# Altium PCB L1-3.PcbDoc
Units mm, origin at the board's own origin, x right, y up, seen from the top; angles counter-clockwise.
Board outline 51.1 x 45.6 mm, 2 copper layers (Top Layer, Bottom Layer), stack 0.325 mm thick; 102 components, 104 nets, 339 pads, 197 vias.
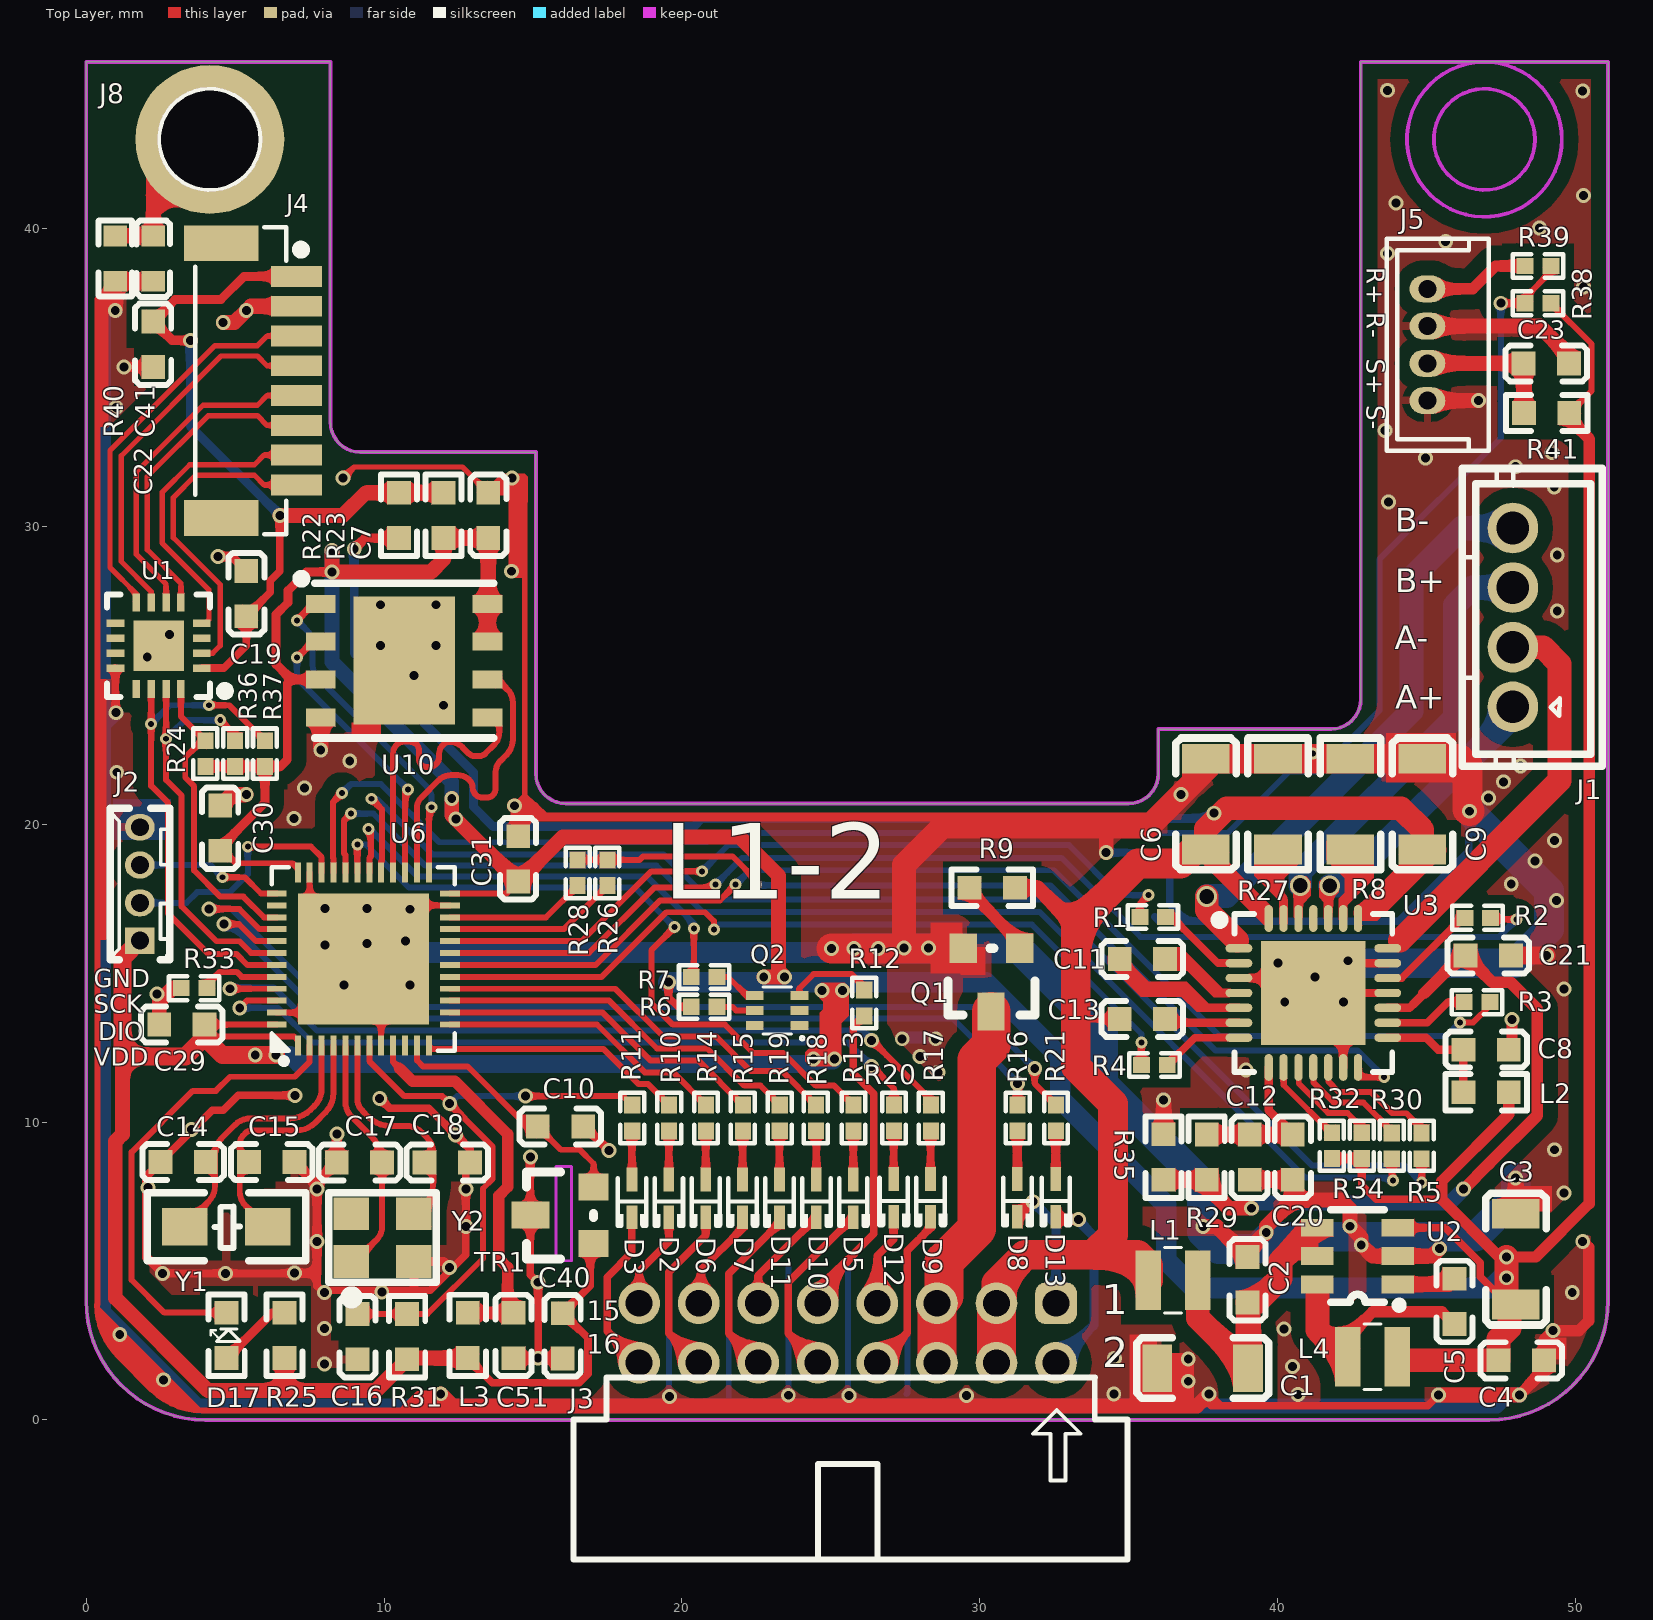
[diagram p0: Top Layer view]
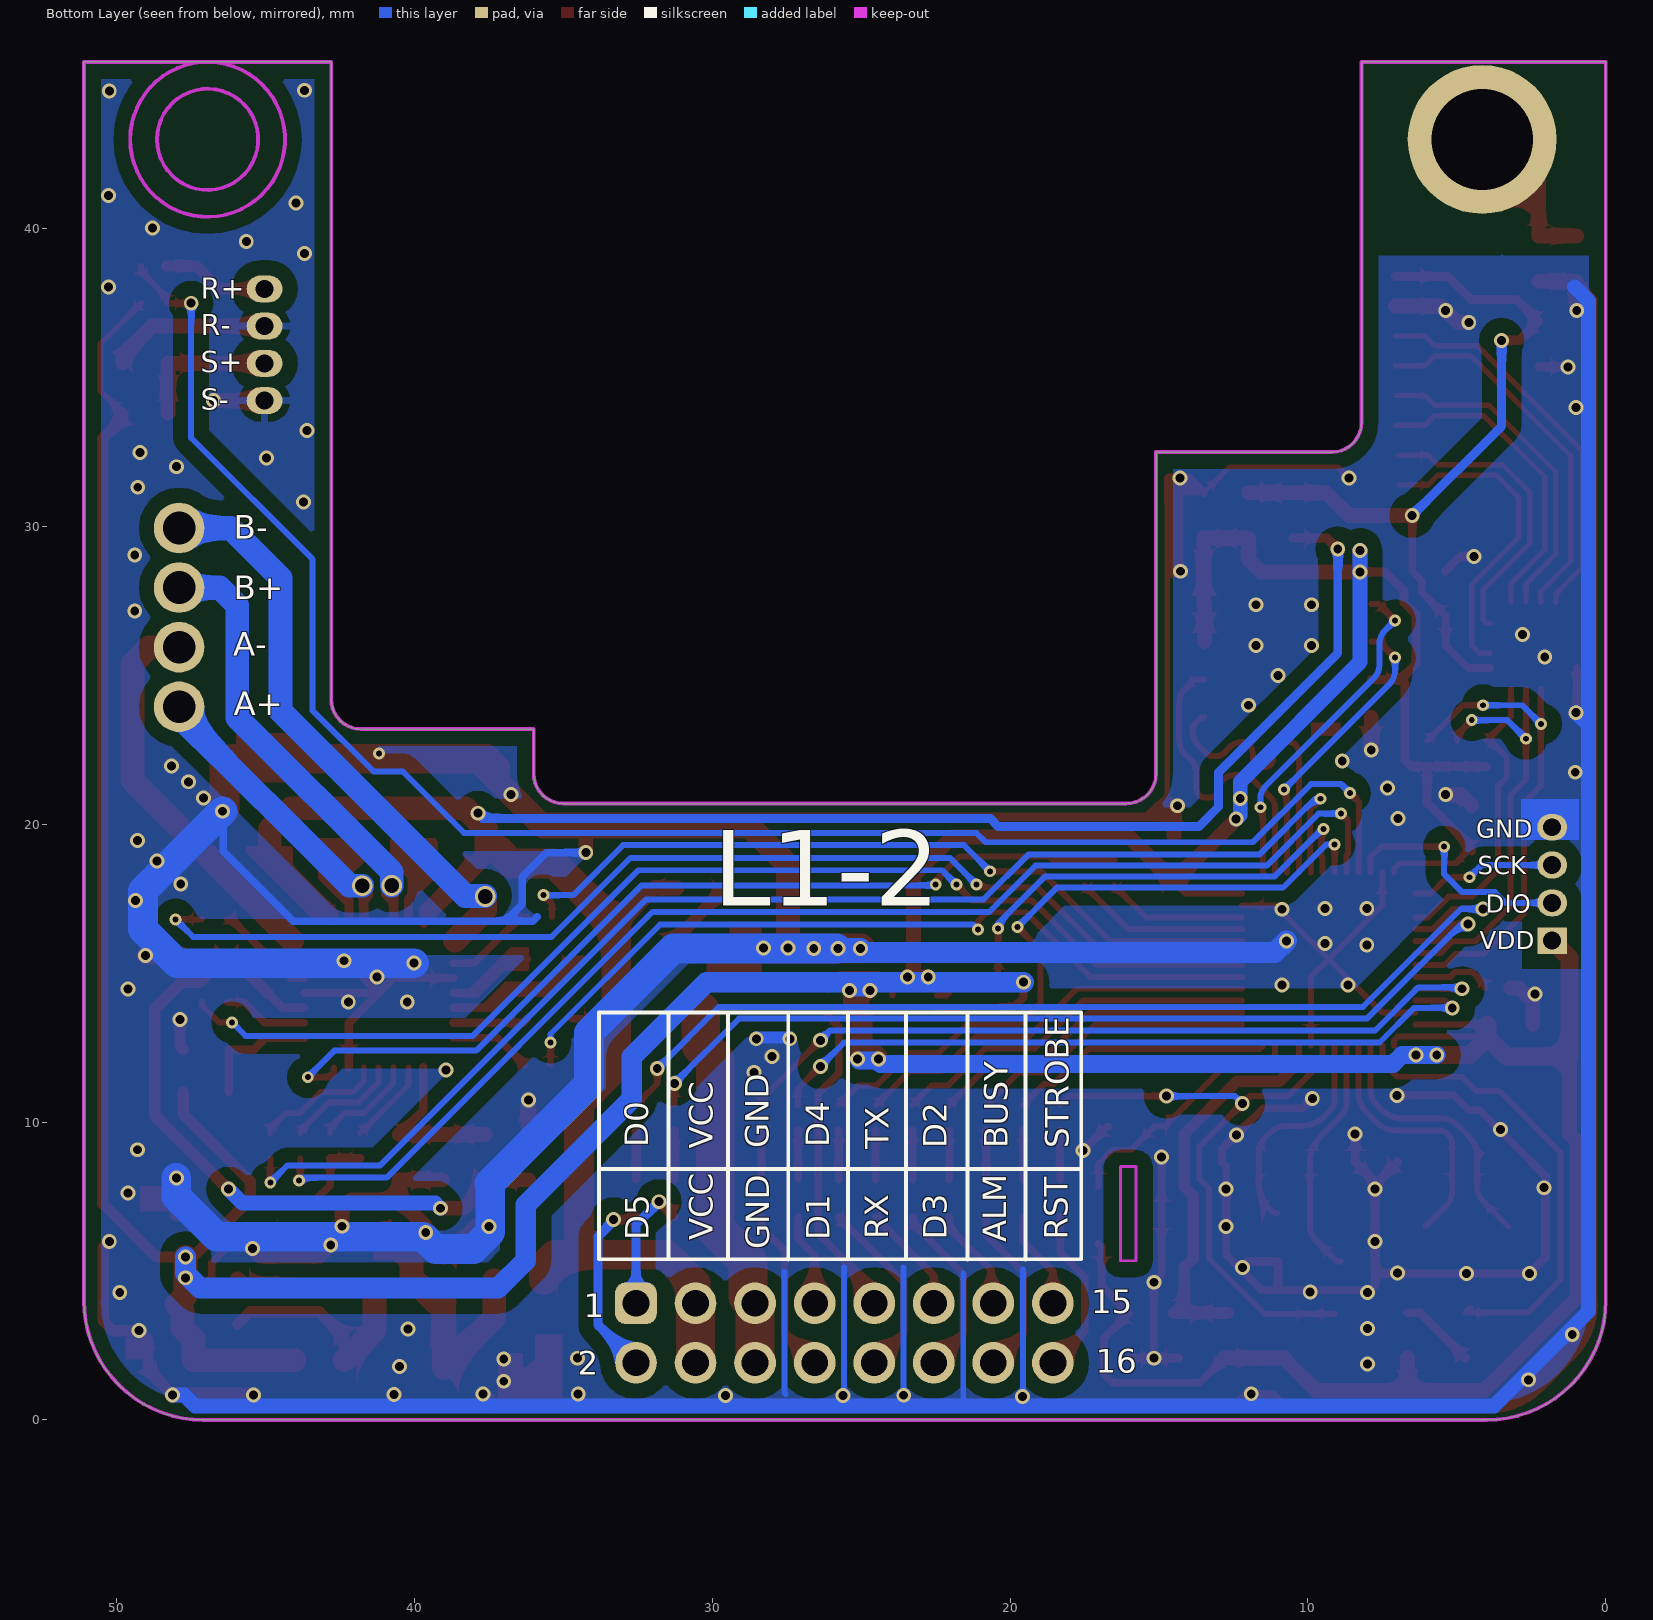
[diagram p1: Bottom Layer view, seen from below]

## Layer stack, top to bottom
Top Solder: solder mask 0.0102, Solder Resist, Dk 3.5
Top Layer: signal copper 0.0356
Dielectric 1: core 0.254, FR-4, Dk 4.2
Bottom Layer: signal copper 0.0356
Bottom Solder: solder mask 0.0102, Solder Resist, Dk 3.5

## Board outline
0,4 ccw(c4,4) 4,0 47.1,0 ccw(c47.1,4) 51.1,4 51.1,45.6 42.8,45.6 42.8,24.2 cw(c41.8,24.2) 41.8,23.2 36,23.2 36,21.7 cw(c35,21.7) 35,20.7 16.1,20.7 cw(c16.1,21.7) 15.1,21.7 15.1,32.5 9.2,32.5 cw(c9.2,33.5) 8.2,33.5 8.2,45.6 0,45.6

## Design rules (kind name [scope] priority, off if disabled: settings)
Clearance Clearance_1 [InPolygon] p1: gap=0.5
Clearance [All] p2: gap=0.145
PolygonConnect PolygonConnect_1 [IsVia] p1: connectstyle=Direct reliefconductorwidth=0.254 reliefentries=4 polygonreliefangle="90 Angle" airgapwidth=0.254
PolygonConnect [All] p2: connectstyle=Relief reliefconductorwidth=0.254 reliefentries=4 polygonreliefangle="90 Angle" airgapwidth=0.254
RoutingVias [All] p1: holewidth=0.3 width=0.5 viastyle="Through Hole" minholewidth=0.15 minwidth=0.3 maxholewidth=0.711 maxwidth=1.27
SolderMaskExpansion [All] p1: expansion=0.102
Width [All] p1: maxlimit=2.54 minlimit=0.1 preferedwidth=0.254
30 further rules are at their usual default settings.

## Classes and differential pairs
component class POWER_PART: C1 C2 C3 C4 C5 C41 D2 D3 D5 D6 D7 D8 D9 D10 D11 D12 D13 D17 J3 J8 L1 L4 Q1 Q2 R6 R7 R9 R10 R11 R12 R13 R14 R15 R16 R17 R18 R19 R20 R21 R25 R40 U2
component class Motor: C6 C8 C9 C11 C12 C13 C19 C20 C21 C22 C23 J1 J4 J5 L2 R1 R2 R3 R4 R5 R8 R22 R23 R24 R26 R27 R28 R29 R30 R32 R34 R35 R36 R37 R38 R39 R41 U1 U3
component class MCU_PART: C10 C14 C15 C16 C17 C18 C29 C30 C31 C40 C51 J2 L3 R31 R33 TR1 U6 Y1 Y2
component class SPI_FLASH: C7 U10

## Components (designator, comment, footprint, x,y, rotation, side; value= is the part's Value field where it differs from the comment)
C1 "47UF/25V" 1206c 37.491,1.74 r180 top locked
C2 "106/25V" 0603C/1#1 38.995,4.71 r90 top locked
C3 "47UF/25V" 1206c 48,5.399 r90 top locked
C4 "106/25V" 0603C/1#1 48.19,2.005 r0 top locked
C5 "104" 0603C/1#1 45.94,3.98 r270 top locked
C6 "47UF/25V" 1206c 37.595,20.68 r90 top locked
C7 "104" 0603C/1#1 13.5,30.375 r90 top locked
C8 "104" 0603c/1 47.005,12.435 r0 top locked
C9 "47UF/25V" 1206c 44.865,20.68 r90 top locked
C10 "104" 0603C/1#1 15.925,9.85 r180 top locked
C11 "223" 0603C/1#1 35.465,15.48 r180 top locked
C12 "106/25V" 0603C/1#1 39.068,8.828 r90 top locked
C13 "104" 0603C/1#1 35.465,13.47 r180 top locked
C14 "12PF" 0603C/1#1 3.253,8.659 r180 top locked
C15 "12PF" 0603C/1#1 6.227,8.66 r0 top locked
C16 "105" 0603C/1#1 9.114,2.8 r90 top locked
C17 "12PF" 0603C/1#1 9.175,8.65 r0 top locked
C18 "12PF" 0603C/1#1 12.125,8.65 r180 top locked
C19 "104" 0603C/1#1 5.375,27.75 r90 top locked
C20 "106/25V" 0603C/1#1 40.515,8.828 r90 top locked
C21 "106/25V" 0603C/1#1 47.075,15.6 r0 top locked
C22 "104" 0603C/1#1 2.25,36.125 r270 top locked
C23 "104" 0603C/1#1 49.027,35.48 r0 top locked
C29 "104" 0603C/1#1 3.213,13.28 r0 top locked
C30 "104" 0603C/1#1 4.5,19.875 r270 top locked
C31 "104" 0603C/1#1 14.505,18.842 r270 top locked
C40 "104" 0603C/1#1 16,2.825 r90 top locked
C41 "102/630V" 0603C/1#2 2.25,39 r90 top locked
C51 "106/25V" 0603C/1#1 14.345,2.837 r90 top locked
D2 "1N4148WT" SOD-523_L1.2-W0.8 19.563,7.44 r90 top locked
D3 "1N4148WT" SOD-523_L1.2-W0.8 18.325,7.44 r90 top locked
D5 "1N4148WT" SOD-523_L1.2-W0.8 25.755,7.44 r90 top locked
D6 "1N4148WT" SOD-523_L1.2-W0.8 20.802,7.44 r90 top locked
D7 "1N4148WT" SOD-523_L1.2-W0.8 22.04,7.44 r90 top locked
D8 "1N4148WT" SOD-523_L1.2-W0.8 31.267,7.46 r90 top locked
D9 "1N4148WT" SOD-523_L1.2-W0.8 28.352,7.46 r90 top locked
D10 "1N4148WT" SOD-523_L1.2-W0.8 24.517,7.44 r90 top locked
D11 "1N4148WT" SOD-523_L1.2-W0.8 23.278,7.44 r90 top locked
D12 "1N4148WT" SOD-523_L1.2-W0.8 27.113,7.46 r90 top locked
D13 "1N4148WT" SOD-523_L1.2-W0.8 32.555,7.46 r90 top locked
D17 "RED" LED0603 4.715,2.84 r90 top locked
J1 "XH2.54-4P" CONN-TH_4P-P2.0 47.905,26.95 r90 top locked
J2 "J-LINK SWD" HDR-SW_4P-P1.27-V0.6 1.8,18 r90 top locked
J3 "87833-1620" DIP_2.0_87833-1620 25.565,2.92 r0 top locked
J4 "HC-1.0-8PLT" CONN-SMD_1X8P-P1.0 5.8,34.9 r270 top locked
J5 "ZX-MX1.25-4PZZ" CONN-TH_4P-P1.25 45.035,36.105 r90 top locked
J8 "screw" VIA3.4-5 4.15,43 r0 top locked
L1 "FTC252010S220MBCA" IND-SMD_L2.5-W2.0 36.495,4.69 r180 top locked
L2 "600@100MHZ" 0603R/1#1 47.005,11.005 r0 top locked
L3 "600@100MHZ" 0603R/1#1 12.812,2.839 r270 top locked
L4 "FTC252012S100MBCA" IND-SMD_L2.5-W2.0 43.19,2.125 r0 top locked
Q1 "AOSS32334C" SOT-23-N 31.346,15.84 r180 top locked
Q2 "2N7002VC" SOT-563_L1.6-W1.2-P0.5 23.2,13.75 r0 top locked
R1 "22R" 0402R/1#1 35.812,16.89 r0 top locked
R2 "22R" 0402R/1#1 46.725,16.86 r180 top locked
R3 "22R" 0402R/1#1 46.705,14.03 r180 top locked
R4 "22R" 0402R/1#1 35.865,11.92 r0 top locked
R5 "22R" 0402R/1#1 44.844,9.207 r90 top locked
R6 "4K7" 0402R/1#2 20.75,13.875 r180 top locked
R7 "100R" 0402R/1#2 20.75,14.875 r180 top locked
R8 "HoYH1206-1W-330mR-1%" 1206R 42.442,20.68 r90 top locked
R9 "10K" 0603R/1#1 30.425,17.87 r0 top locked
R10 "1K" 0402R/1#1 19.573,10.14 r90 top locked
R11 "1K" 0402R/1#1 18.335,10.14 r90 top locked
R12 "22R" 0402R/1#1 26.125,14 r270 top locked
R13 "100R" 0402R/1#1 25.764,10.14 r90 top locked
R14 "1K" 0402R/1#1 20.811,10.14 r90 top locked
R15 "1K" 0402R/1#1 22.05,10.14 r90 top locked
R16 "1K" 0402R/1#1 31.277,10.143 r270 top locked
R17 "1K" 0402R/1#1 28.361,10.14 r90 top locked
R18 "1K" 0402R/1#1 24.5,10.143 r270 top locked
R19 "1K" 0402R/1#1 23.289,10.143 r270 top locked
R20 "1K" 0402R/1#1 27.124,10.143 r270 top locked
R21 "1K" 0402R/1#1 32.565,10.143 r270 top locked
R22 "0R" 0603R/1#1 10.5,30.375 r270 top locked
R23 "NC" 0603R/1#1 12,30.375 r270 top locked
R24 "10K" 0402R/1#2 4,22.375 r90 top locked
R25 "4.7K" 0603R/1#1 6.655,2.84 r270 top locked
R26 "1K" 0402R/1#1 17.5,18.375 r270 top locked
R27 "HoYH1206-1W-330mR-1%" 1206R 40.018,20.68 r90 top locked
R28 "22R" 0402R/1#1 16.5,18.375 r270 top locked
R29 "10K 0.1%" 0603R/1#1 37.623,8.828 r90 top locked
R30 "22R" 0402R/1#1 43.838,9.207 r90 top locked
R31 "5.6K" 0603R/1#1 10.777,2.8 r270 top locked
R32 "1K" 0402R/1#1 41.825,9.21 r270 top locked
R33 "1K" 0402R/1#1 3.625,14.5 r0 top locked
R34 "1K" 0402R/1#1 42.831,9.21 r270 top locked
R35 "10K 0.1%" 0603R/1#1 36.175,8.83 r270 top locked
R36 "10K" 0402R/1#2 5,22.375 r90 top locked
R37 "10K" 0402R/1#2 6,22.375 r90 top locked
R38 "10K" 0402R/1#2 48.75,37.5 r180 top locked
R39 "1K" 0402R/1#2 48.75,38.75 r180 top locked
R40 "1M" 0603R/1#2 0.975,39 r270 top locked
R41 "82R" 0603R/1#1 49.037,33.81 r0 top locked
TR1 "MCP9700A" SOT-23-3-TR1 15.975,6.875 r90 top locked
U1 "LM339BIRTER" QFN-16-L3.0-W3.0-P0.5 2.43,26 r180 top locked
U2 "LMR50410Y3FQDBVRQ1" SOT-23-6_L2.9-W1.6-P0.95 42.69,5.505 r180 top locked
U3 "TMC2209-LA-T" QFN-28_L5.0-W5.0-P0.50 41.205,14.34 r270 top locked
U6 "AT32F403ACGU7" QFN-48_L6.0-W6.0-P0.40 9.305,15.48 r0 top locked
U10 "W25Q128JVPIQ" WSON-8_L5.0-W6.0-P1.27 10.675,25.5 r0 top locked
Y1 "32.768K" 3215-2 6.1,6.49 r180 top locked
Y2 "8M" 3225-4 8.9,5.325 r0 top locked

## Footprints (in the part's own frame and the unit in brackets; to place one, negate y for a bottom-side part, rotate by r counter-clockwise, add the part's x,y. Pads: shape width x height; smd on the part's side, far side on the other; paste and mask are expansions set on the pad)
0402R/1#1 [mm]
  rect 0.566x0.54 smd paste-100 mask+0.051: 1(-0.433,0) 2(0.433,0)
  silkscreen extent -0.84,-0.4 0.85,0.4
0402R/1#2 [mm]
  rect 0.566x0.54 smd paste-100 mask+0.051: 1(0.433,0) 2(-0.433,0)
  silkscreen extent -0.85,-0.4 0.84,0.4
0603C/1#1 [mm]
  rect 0.8x0.8 smd: 1(-0.762,0) 2(0.762,0)
  silkscreen extent -1.37,-0.61 1.37,0.61
0603C/1#2 [mm]
  rect 0.7x0.8 smd: 1(-0.762,0) 2(0.762,0)
  silkscreen extent -1.28,-0.56 1.28,0.56
0603c/1 [mm]
  rect 0.8x0.8 smd: 1(-0.762,0) 2(0.762,0)
  silkscreen extent -1.37,-0.61 1.37,0.61
0603R/1#1 [mm]
  rect 0.8x0.8 smd: 1(-0.762,0) 2(0.762,0)
  silkscreen extent -1.37,-0.61 1.37,0.61
0603R/1#2 [mm]
  rect 0.7x0.8 smd: 1(-0.762,0) 2(0.762,0)
  silkscreen extent -1.28,-0.56 1.28,0.56
1206c [mm]
  rect 1x1.6 smd: 1(-1.524,0) 2(1.524,0)
  silkscreen extent -2.21,-1.02 2.22,1.01
1206R [mm]
  rect 1x1.6 smd: 1(-1.524,0) 2(1.524,0)
  silkscreen extent -2.21,-1.02 2.22,1.01
3215-2 [mil]
  rect 60x50 smd: 1(0,0) 2(110,0)
  silkscreen extent -50,-45 159,45
3225-4 [mm]
  rect 1.2x1.1 smd: 1(0,0) 2(2.1,0) 3(2.1,1.6) 4(0,1.6)
  silkscreen extent -0.75,-1.38 2.85,2.3
CONN-SMD_1X8P-P1.0 [mm]
  rect 0.7x1.7 smd paste+0 mask+0.05: 1(-3.5,1.26) 2(-2.5,1.26) 3(-1.5,1.26) 4(-0.5,1.26) 5(0.5,1.26) 6(1.5,1.26) 7(2.5,1.26) 8(3.5,1.26)
  rect 1.2x2.5 smd paste+0 mask+0.05: 9(-4.61,-1.26) 10(4.61,-1.26)
  silkscreen extent -5.15,-2.14 5.16,1.56
CONN-TH_4P-P1.25 [mm]
  oval 0.9x1.2 hole 0.6 paste+0 mask+0.05: 1(1.875,0) 2(0.625,0) 3(-0.625,0) 4(-1.875,0)
  silkscreen extent -3.56,-2.07 3.56,1.36
CONN-TH_4P-P2.0 [mm]
  round 1.7 hole 1.1: 1(-3,0) 2(-1,0) 3(1,0) 4(3,0)
  silkscreen extent -5,-3 5,1.7
DIP_2.0_87833-1620 [mm]
  rrect50% 1.4x1.4 hole 0.9: 1(7,1)
  round 1.4 hole 0.9: 2(7,-1) 3(5,1) 4(5,-1) 5(3,1) 6(3,-1) 7(1,1) 8(1,-1) 9(-1,1) 10(-1,-1) 11(-3,1) 12(-3,-1) 13(-5,1) 14(-5,-1) 15(-7,1) 16(-7,-1)
  silkscreen extent -9.2,-7.6 9.4,-1.5
HDR-SW_4P-P1.27-V0.6 [mm]
  rect 0.9x1 hole 0.6: 1(-1.905,0)
  oval 0.9x1 hole 0.6: 2(-0.635,0) 3(0.635,0) 4(1.905,0)
  silkscreen extent -2.54,-1 2.54,1
IND-SMD_L2.5-W2.0 [mm]
  rect 0.85x2 smd: 1(-0.83,0) 2(0.83,0)
  silkscreen extent -0.29,-1.1 0.29,1.1
LED0603 [mm]
  rect 0.8x0.8 smd: 1(-0.762,0) 2(0.762,0)
  silkscreen extent -1.37,-0.61 1.37,0.61
QFN-16-L3.0-W3.0-P0.5 [mm]
  rect 0.6x0.25 smd paste+0.051: 1(-1.45,0.75) 2(-1.45,0.25) 3(-1.45,-0.25) 4(-1.45,-0.75) 9(1.45,-0.75) 10(1.45,-0.25) 11(1.45,0.25) 12(1.45,0.75)
  rect 0.25x0.6 smd paste+0.051: 5(-0.75,-1.45) 6(-0.25,-1.45) 7(0.25,-1.45) 8(0.75,-1.45) 13(0.75,1.45) 14(0.25,1.45) 15(-0.25,1.45) 16(-0.75,1.45)
  rect 1.7x1.7 smd paste+0.051: 17(0,0)
  silkscreen extent -2.38,-1.72 1.72,1.72
QFN-28_L5.0-W5.0-P0.50 [mm]
  rect 3.5x3.5 smd: 0(0,0)
  oval 0.28x0.9 smd paste-100 mask+0.051: 1(-1.501,-2.5) 2(-1.001,-2.5) 3(-0.501,-2.5) 4(0,-2.5) 5(0.5,-2.5) 6(1.001,-2.5) 7(1.501,-2.5) 15(1.501,2.5) 16(1.001,2.5) 17(0.5,2.5) 18(0,2.5) 19(-0.501,2.5) 20(-1.001,2.5) 21(-1.501,2.5)
  oval 0.9x0.28 smd paste-100 mask+0.051: 8(2.5,-1.501) 9(2.5,-1.001) 10(2.5,-0.501) 11(2.5,0) 12(2.5,0.5) 13(2.5,1.001) 14(2.5,1.501) 22(-2.5,1.501) 23(-2.5,1.001) 24(-2.5,0.5) 25(-2.5,0) 26(-2.5,-0.501) 27(-2.5,-1.001) 28(-2.5,-1.501)
  silkscreen extent -2.65,-3.3 2.65,2.65
QFN-48_L6.0-W6.0-P0.40 [mm]
  rect 0.2x0.665 smd paste-100 mask+0.05: 1(-2.2,-2.908) 2(-1.8,-2.908) 3(-1.4,-2.908) 4(-1,-2.908) 5(-0.6,-2.908) 6(-0.2,-2.908) 7(0.2,-2.908) 8(0.6,-2.908) 9(1,-2.908) 10(1.4,-2.908) 11(1.8,-2.908) 12(2.2,-2.908) 25(2.2,2.908) 26(1.8,2.908) 27(1.4,2.908) 28(1,2.908) 29(0.6,2.908) 30(0.2,2.908) 31(-0.2,2.908) 32(-0.6,2.908) 33(-1,2.908) 34(-1.4,2.908) 35(-1.8,2.908) 36(-2.2,2.908)
  rect 0.665x0.2 smd paste-100 mask+0.05: 13(2.908,-2.2) 14(2.908,-1.8) 15(2.908,-1.4) 16(2.908,-1) 17(2.908,-0.6) 18(2.908,-0.2) 19(2.908,0.2) 20(2.908,0.6) 21(2.908,1) 22(2.908,1.4) 23(2.908,1.8) 24(2.908,2.2) 37(-2.908,2.2) 38(-2.908,1.8) 39(-2.908,1.4) 40(-2.908,1) 41(-2.908,0.6) 42(-2.908,0.2) 43(-2.908,-0.2) 44(-2.908,-0.6) 45(-2.908,-1) 46(-2.908,-1.4) 47(-2.908,-1.8) 48(-2.908,-2.2)
  rect 4.4x4.4 smd paste-100 mask+0.05: 49(0,0)
  silkscreen extent -3.08,-3.53 3.08,3.08
SOD-523_L1.2-W0.8 [mm]
  rect 0.8x0.36 smd paste+0 mask+0.051: 1(0.635,0) 2(-0.635,0)
  silkscreen extent -0.94,-0.55 0.68,0.54
SOT-23-3-TR1 [mm]
  rect 0.914x1 smd: 1(-0.95,-1.06) 2(0.95,-1.06)
  rect 0.914x1.27 smd: 3(0.011,1.06)
  Keep-Out Layer lines w0.1: -1.528,0.2 -1.528,-0.32 1.632,-0.32 1.632,0.2 -1.528,0.2
  silkscreen extent -1.46,-1.06 1.46,1.19
SOT-23-6_L2.9-W1.6-P0.95 [mm]
  rect 1.1x0.6 smd paste+0 mask+0.051: 1(-1.35,0.95) 2(-1.35,0) 3(-1.35,-0.95) 4(1.35,-0.95) 5(1.35,0) 6(1.35,0.95)
  silkscreen extent -1.52,-1.55 0.9,1.78
SOT-23-N [mm]
  rect 0.914x1 smd: 1(0,0) 3(1.9,0)
  rect 0.914x1.27 smd: 2(0.961,2.12)
  silkscreen extent -0.51,0 2.41,2.25
SOT-563_L1.6-W1.2-P0.5 [mm]
  rect 0.6x0.3 smd paste+0.051: 1(0.75,-0.5) 2(0.75,0) 3(0.75,0.5) 4(-0.75,0.5) 5(-0.75,0) 6(-0.75,-0.5)
  silkscreen extent -0.48,-0.99 0.9,0.79
VIA3.4-5 [mm]
  round 5 hole 3.4: 1(0,0)
WSON-8_L5.0-W6.0-P1.27 [mm]
  rect 3.4x4.3 smd: 0(0,0)
  rect 1x0.6 smd: 1(-2.8,1.905) 2(-2.8,0.635) 3(-2.8,-0.635) 4(-2.8,-1.905) 5(2.8,-1.905) 6(2.8,-0.635) 7(2.8,0.635) 8(2.8,1.905)
  silkscreen extent -3.6,-2.6 3,2.9

## Part data
C1 C2 C3 C4 C5 C6 C7 C8 C9 C10 C11 C12 C13 C14 C15 C16 C17 C18 C19 C20 C21 C22 C23 C29 C30 C31 C40 C41 C51: library part 电容, "Capacitor"
D2 D3 D5 D6 D7 D8 D9 D10 D11 D12 D13: library part DIODE_5
D17: library part LED
J1 J2 J5: library part CON4, "SOCKET"
J3: library part DCOM16/1
J4: "HC-1.0-8PLT,HCTL(华灿天禄),SMD,P=1mm?,C2845376,1x8P 间距:1mm 立贴 系列:SH"
J8: library part hold
L1 L4: library part 电感, "Inductor"
L2 L3: library part 磁珠, "Inductor"
Q1: library part AO3400
Q2: library part 2N7002VC-7
R1 R2 R3 R4 R5 R6 R7 R8 R9 R10 R11 R12 R13 R14 R15 R16 R17 R18 R19 R20 R21 R22 R23 R24 R26 R27 R28 R29 R30 R31 R32 R33 R34 R35 R36 R37 R38 R39 R40 R41: library part RESS1, "Resistor"
R25: library part RES_4G
TR1: library part M1601Z
U1: "LM239LQ/TR-HG，LM339BIRTER，LM339LVRTER，C53374692，C33094051"
U2: library part LMR50410YFQDBVRQ1
U6: library part AT32F403ACGX7_48P
U10: library part W25Q256J
Y1: library part 晶振, "CRYSTAL"
Y2: library part 晶振_4P_2, "CRYSTAL"

## Via types
v1: diameter 0.5, hole 0.3, Top Layer to Bottom Layer, tented both sides, 164 vias
v2: diameter 0.4, hole 0.2, Top Layer to Bottom Layer, tented both sides, 30 vias
v3: diameter 0.7, hole 0.5, Top Layer to Bottom Layer, tented both sides, 3 vias

## Nets (pads, with @x,y where several pads share a name; then routed paths per layer and width w, separated by ;. In a path a pad name is that pad's centre, name@x,y a point inside that pad or via, vN(x,y) a via of type N, cw(c..) or ccw(c..) an arc to the next point about the centre after c; other vN are vias at no path point)
A+: J1.1 U3.24 | length 10
  Top Layer w0.28: U3.24 41.705,17.9 41.755,17.95 41.765,17.94 v3(41.755,17.94)
  Bottom Layer w0.8: v3(41.755,17.94) 42.185,17.94 47.905,23.66 J1.1
A-: J1.2 U3.21 | length 13.3
  Top Layer w0.8: 44.11,16.105 49.475,21.47 49.475,25.388 48.913,25.95 J1.2
ALRAM: R14.2 U6.13 | length 9.7
  Top Layer w0.2: U6.13 17.15,13.28 18.755,11.675 19.709,11.675 R14.2
B+: J1.3 U3.26 | length 15
  Top Layer w0.28: U3.26 40.705,17.87 40.734,17.84 40.795,17.901 40.746,17.95 v3(40.765,17.95)
  Bottom Layer w0.8: v3(40.765,17.95) 40.765,18.393 45.955,23.583 45.955,27.36 46.545,27.95 J1.3
B-: J1.4 U3.1 | length 19.9
  Top Layer w0.8: v3(37.625,17.58) 37.625,17.13 38.65,16.105
  Bottom Layer w0.8: v3@37.635,17.6 38.295,17.6 44.505,23.81 44.505,28.27 46.185,29.95 J1.4
BOOT0: R33.2 U6.44 | length 2.7
  Top Layer w0.2: R33.2 4.058,14.633 4.475,15.05 5.05,15.05 5.22,14.88 U6.44
BUSY: R15.2 U6.14 | length 11.1
  Top Layer w0.2: U6.14 17.34,13.68 18.945,12.075 20.548,12.075 R15.2
D0: R16.1 U6.41 | length 31.6
  Top Layer w0.2: v1(4.625,16.65) 5.13,16.65 5.7,16.08 U6.41 ; R16.1 v1(31.277,11.302)
  Bottom Layer w0.2: v1(4.625,16.65) 4.85,16.65 8.025,13.475 29.104,13.475 v1(31.277,11.302)
D1: R17.2 U6.45 | length 26.8
  Top Layer w0.2: v1(4.825,14.48) U6.45 ; v1(26.375,12.75) 28.361,10.764 R17.2
  Bottom Layer w0.2: v1@4.905,14.53 6.295,14.53 7.75,13.075 26.05,13.075 v1(26.375,12.75)
D2: R18.1 U6.16 | length 13.9
  Top Layer w0.2: U6.16 17.77,14.48 19.375,12.875 21.15,12.875 22.3,11.725 23.351,11.725 R18.1
D3: R19.1 U6.15 | length 12.5
  Top Layer w0.2: U6.15 17.56,14.08 19.165,12.475 20.85,12.475 22.1,11.225 22.64,11.225 R19.1
D4: R20.1 U6.46 | length 25
  Top Layer w0.2: v1(5.155,13.84) 5.395,14.08 U6.46 ; v1(26.375,11.875) 27.124,11.126 R20.1
  Bottom Layer w0.2: v1(5.155,13.84) 6.435,13.84 7.6,12.675 25.575,12.675 v1(26.375,11.875)
D5: R21.1 U6.40 | length 34.1
  Top Layer w0.2: v1(4.125,17.16) 5.14,17.16 5.82,16.48 U6.40 ; v1(31.85,11.8) 31.85,11.291 R21.1 R21.1@32.565,10.6
  Bottom Layer w0.2: v1@4.035,17.16 v1(4.125,17.16) 4.865,17.16 8.15,13.875 29.775,13.875 v1(31.85,11.8)
EA: R37.1 U1.14 U6.43 | length 16.7
  Top Layer w0.2: U1.14 v2(2.18,23.375) 2.18,21.295 2.75,20.725 2.75,17 4.1,15.65 5.04,15.65 5.41,15.28 U6.43 ; v2(4.125,24) 4.808,24 R37.1
  Bottom Layer w0.2: v2(2.18,23.375) 2.805,24 v2(4.125,24)
EA+: J4.3 U1.8 | length 13.3
  Top Layer w0.178: U1.8 1.68,27.745 0.8,28.625 0.8,32.55 4.325,36.075 5.75,36.075 6.075,36.4 J4.3
EA-: J4.4 U1.7 | length 12.7
  Top Layer w0.178: U1.7 2.18,27.82 1.175,28.825 1.175,32.375 4.525,35.725 5.75,35.725 6.075,35.4 J4.4
EB: R36.1 U1.15 U6.42 | length 14.3
  Top Layer w0.2: U1.15 v2(2.68,22.875) 2.68,21.495 3.2,20.975 3.2,17.25 4.375,16.075 5.145,16.075 5.54,15.68 U6.42 ; v2(4.5,23.5) 5,23 R36.1
  Bottom Layer w0.2: v2(2.68,22.875) 3.305,23.5 v2(4.5,23.5)
EB+: J4.5 U1.6 | length 11.2
  Top Layer w0.178: U1.6 2.68,28.07 1.675,29.075 1.675,31.825 3.925,34.075 5.75,34.075 6.075,34.4 J4.5
EB-: J4.6 U1.5 | length 10.7
  Top Layer w0.178: U1.5 3.18,28.095 2.05,29.225 2.05,31.675 4.1,33.725 5.75,33.725 6.075,33.4 J4.6
EZ: R24.1 U1.16 U6.39 | length 10.3
  Top Layer w0.2: U1.16 3.18,23.628 R24.1 3.883,22.808 3.325,22.25 3.325,21.575 3.625,21.275 3.625,18.45 4.5,17.575 5.275,17.575 5.97,16.88 U6.39
EZ+: J4.7 U1.4 | length 10.2
  Top Layer w0.178: U1.4 4,26.75 4.125,26.875 4.125,27.875 2.55,29.45 2.55,31.15 3.475,32.075 5.65,32.075 5.975,32.4 J4.7@6.96,32.4
EZ-: J4.8 U1.2 | length 10.8
  Top Layer w0.178: U1.2 4.25,25.75 4.5,26 4.5,28.05 2.925,29.625 2.925,30.975 3.675,31.725 5.65,31.725 5.975,31.4 J4.8@6.96,31.4
GND: C1.2 C2.2 C3.2 C4.2 C6.2 C7.2 C8.2 C9.2 C10.1 C12.1 C14.2 C15.2 C16.1 C17.1 C18.1 C19.2 C20.1 C21.2 C22.2 C23.2 C29.1 C30.1 C31.1 C40.1 C41.1 C51.1 J2.4 J4.2 J5.2 J5.4 Q1.3 R8.2 R27.2 R33.1 R35.1 R40.2 TR1.3 U1.12 U1.17 U2.2 U3.0 U3.3 U3.13 U3.18 U3.20 U6.8 U6.23 U6.35 U6.47 U6.49 U10.0 U10.4 Y2.2 | length 464.9
  Top Layer w0.178: v1(8.625,31.625) 9,32 12.637,32 C7.2 14.275,31.137 ; v1(14.275,28.5) 14.275,31.137 ; v1@14.275,31.6 14.275,31.137 ; v1(14.375,20.625) 14.725,20.975 ; 15.05,20.6 15.05,20.65 14.725,20.975 ; 14.275,31.137 14.563,31.137 14.725,30.975 14.725,20.975
  Top Layer w0.2: 0.365,3.882 ccw(c2.905,3.912) 1.109,2.116 2.205,1.02 ccw(c3.895,2.71) 3.895,0.32 10.585,0.32 ; 0.375,3.872 0.375,37.638 R40.2 ; U6.47 7.505,13.68 U6.49 ; U6.35 7.505,17.28 U6.49 ; U6.8 9.905,14.88 U6.49 ; v1(11.905,0.88) 11.145,0.88 10.715,0.45 ; U6.23 11.105,17.28 U6.49 ; 12.484,0.464 12.462,0.442 ; 10.585,0.32 12.34,0.32 12.462,0.442 ; 10.585,0.32 10.715,0.45 ; 10.715,0.45 12.455,0.45 12.462,0.442
  Top Layer w0.254: v1@0.98,23.77 U1.12 ; C14.2 4.232,10.4 4.605,10.4 5.105,10.9 v1(7.005,10.9) ; v1(2.565,4.92) v1(4.68,4.92) 6.975,4.92 v1(6.995,4.94) ; 7.75,4.925 7.75,4.5 7.9,4.35 11.55,4.35 12.75,5.55 v1(12.75,6.5) v1(12.75,7.75) 12.75,8.513 C18.1 12.887,9.093 v1(12.405,9.575) 11.505,10.475 10.18,10.475 v1(9.855,10.8) ; v1(14.915,8.835) TR1.3 14.915,4.885 v1(15.175,4.625) v1(15.175,2.075) ; C10.1 16.75,9.85 v1(17.55,9.05) ; v1@37.55,0.715 37.785,0.48 38.095,0.48 ; v1(37.705,0.87) 38.095,0.48 ; 38.1,0.475 38.095,0.48 ; v1(45.402,0.842) 45.04,0.48 38.095,0.48
  Top Layer w0.28: U3.3 40.705,14.84 U3.0 ; U3.13 42.206,13.339 U3.0 ; U3.18 U3.0 ; U3.20 42.206,15.341 U3.0
  Top Layer w0.3: v1(1.262,35.363) C22.2 ; C14.2 2.025,8.193 2.025,5.46 v1(2.565,4.92) ; v1(4.425,29) 4.887,29 C19.2 ; C15.2 v1@7.75,7.899 ; v1(6.995,4.94) 7.01,4.925 7.75,4.925 v1(7.75,6) v1(7.75,7.75) v1@7.75,7.899 ; v1@8.413,9.588 C17.1 7.75,7.987 v1@7.75,7.899 ; 11,4.425 Y2.2 12,5.325 v1(12.2,5.125) ; C7.2 13.988,31.625 v1(14.3,31.625) ; C51.1 v1(15.175,2.075) C40.1@15.988,2.075 ; v1(14.375,20.625) 15.025,20.625 15.05,20.6 15.4,20.25 ; C31.1@14.675,19.975 14.95,20.25 15.4,20.25 ; 36,20.25 15.4,20.25
  Top Layer w0.381: C8.2 47.875,12.543 v1(47.875,13.45) ; v1(48.125,0.842) 48.952,1.669 C4.2 48.952,2.702 v1(49.25,3) 50.125,3 50.45,3.325 50.45,5.8 v1(50.25,6)
  Top Layer w0.5: v1(0.975,37.25) R40.2 C41.1 ; C29.1 2.451,14.051 2.9,14.5 R33.1 ; C30.1 4.863,21 v1(5.375,21) ; v1(4.6,36.85) 4.975,36.85 v1(5.375,37.25) 5.525,37.4 J4.2 ; v1(7.875,22.5) U10.4 ; v1(11.905,0.88) 12.321,0.464 12.484,0.464 37.299,0.464 ; v1(14.375,20.625) 14.505,20.495 C31.1 ; v1(34.25,19.05) 34.25,19.87 ; C1.2@35.967,1.313 C1.2 ; R35.1 v1(36.175,10.75) ; 37.435,0.6 37.55,0.715 v1(37.705,0.87) ; v1(37.495,6.5) 37.967,6.5 C2.2 38.995,5.67 v1(39.625,6.3) 39.625,6.495 40.515,7.385 ; C12.1 C20.1 40.515,7.385 ; J5.4 v1(46.75,34.23) ; J5.2 48.815,36.73 49.799,35.746 C23.2@49.799,35.49 ; v1(45.402,0.842) v1(48.125,0.842) ; v1(45.44,5.755) 45.19,5.505 U2.2 43.19,5.505 v1(42.815,5.88) 42.815,6.13 v1(42.44,6.505) 42.44,7.08 42.135,7.385 40.515,7.385 ; C3.2 v1(48,8.125)
  Top Layer w0.6: C21.2 v1(49.035,15.6)
  Top Layer w0.8: v1(27.455,15.85) 27.455,18.64 28.735,19.92 35.675,19.92 v1(36.755,21) 37.2,21.445 ; C6.2@37.6,22.225 37.5,22.225 37.2,21.925 37.2,21.445 ; 38.775,22.175 37.93,22.175 37.2,21.445
  Top Layer w1: v1(25.025,15.83) v1(25.775,15.83) ; v1@25.835,15.83 v1(26.595,15.83) 27.455,15.83 Q1.3@29.365,15.83 ; C6.2 R27.2 R8.2 C9.2 46.105,22.204 ; 46.385,21.998 46.385,20.5 v1(46.445,20.44)
  Bottom Layer w0.2: 19.575,5.05 19.575,0.8 v1(19.585,0.79) ; 21.575,0.5 21.575,4.925 ; v1(23.575,0.83) 23.575,5.125 ; v1@25.575,0.86 25.575,5.125 ; 27.55,0.875 27.575,0.9 27.575,4.975
  Bottom Layer w0.254: v1(34.25,19.05) 35.575,19.05 36.38,18.245 36.38,17.325 36.955,16.75 ; 35.88,16.9 36.03,16.75 36.955,16.75 ; v1@46.43,20.425 46.43,19.1 44.08,16.75 36.955,16.75
  Bottom Layer w0.5: v1(1,23.75) 0.575,23.325 ; 1.05,38.05 0.575,37.575 0.575,37.25 0.575,23.325 ; v1(48.125,0.842) 47.742,0.842 47.375,0.475 23.575,0.475 3.75,0.475 0.575,3.65 0.575,23.325
  Bottom Layer w0.7: v1(10.725,16.09) 11.115,15.7 25.645,15.7 v1(25.775,15.83) v1(25.025,15.83)
  Bottom Layer w1: v1@25.825,15.83 v1(26.595,15.83) 27.455,15.83 31.315,15.83 34.145,13 34.145,11.29 37.495,7.94 37.455,7.9 37.455,6.31 38.025,5.74 39.295,5.74 39.705,6.15 46.65,6.15 48,7.5 v1(48,8.125) ; v1(40.015,15.34) 47.975,15.34 49.115,16.48 49.115,17.77 v1(46.445,20.44)
  other v1: 25.615,0.82 29.555,0.825 40.69,0.855 34.505,0.875 37.005,1.3 2.6,1.35 40.5,1.8 8,1.875 37.005,2.05 34.53,2.075 1.125,2.875 40.225,3.05 8,3.075 8,4.275 49.9,4.275 9.925,4.3 49.625,7.625 2.075,7.8 49.3,9.075 8.425,9.6 3.53,9.75 28.6,11.675 38.95,11.75 28,12.2 27.4,12.8 28.525,12.8 40.245,14.03 42.225,14.04 2.375,14.3 49.625,14.475 8.65,14.6 10.875,14.6 41.265,14.88 42.375,15.42 28.285,15.85 8.025,15.95 9.425,16 10.875,17.15 8.025,17.175 9.425,17.175 49.375,17.45 47.85,18 48.65,18.775 49.305,19.46 6.975,20.2 47.085,20.88 7.325,21.225 47.585,21.43 1.025,21.75 48.155,21.96 8.85,22.125 12,24 11,25 2.05,25.625 9.875,26 11.75,26 2.8,26.375 49.395,27.17 9.875,27.375 11.75,27.375 49.395,29.05 43.735,30.83 49.295,31.32 47.995,32.01 44.975,32.3 49.215,32.49 43.615,33.23 1,34 50.275,38.05 43.7,39.175 45.65,39.575 48.795,40.03 43.985,40.87 50.275,41.12 50.25,44.625 43.7,44.65
  other v2: 41.2,22.375
M_DIAG: R30.1 U6.32 | length 42.9
  Top Layer w0.2: U6.32 8.705,18.975 8.655,19.025 8.655,20.13 v2(8.885,20.36) ; R30.1 43.838,8.077 v2(43.875,8.04)
  Bottom Layer w0.2: v2(8.885,20.36) 9.645,20.36 11.39,18.615 19.15,18.615 20.705,17.06 32.015,17.06 40.935,8.14 43.775,8.14 v2(43.875,8.04)
M_DIR: R2.1 U6.19 | length 39.4
  Top Layer w0.2: U6.19 16.88,15.68 19.075,17.875 21.025,17.875 v2(21.125,17.975) ; R2.1@47.141,16.82 47.151,16.81 v2(48.025,16.81)
  Bottom Layer w0.2: v2(21.125,17.975) 22.025,18.875 32.75,18.875 35.4,16.225 47.44,16.225 v2(48.025,16.81)
M_ENN: R1.1 U6.20 | length 26.3
  Top Layer w0.2: U6.20 16.63,16.08 18.975,18.425 v2(20.675,18.425) ; R1.1 35.379,17.329 v2(35.675,17.625)
  Bottom Layer w0.2: v2(20.675,18.425) 21.55,19.3 33,19.3 34.675,17.625 v2(35.675,17.625)
M_INDEX: R5.1 U6.29 | length 44
  Top Layer w0.2: v2(9.575,20.86) 9.935,20.5 9.935,18.78 9.905,18.75 U6.29 ; v2(44.844,7.971) R5.1
  Bottom Layer w0.2: v2(9.575,20.86) 9.765,20.86 11.64,18.985 19.39,18.985 20.895,17.48 32.225,17.48 41.155,8.55 44.265,8.55 v2(44.844,7.971)
M_ORG: R38.1 R39.2 U6.33 | length 58.2
  Top Layer w0.2: U6.33 8.305,18.85 8.28,18.875 8.28,20.745 v2(8.585,21.05) ; v1(47.5,37.5) R38.1 48.317,37.692 49.183,38.558 R39.2
  Bottom Layer w0.2: v2(8.585,21.05) 8.885,21.35 9.9,21.35 11.85,19.4 20.825,19.4 21.135,19.71 38.335,19.71 40.4,21.775 41.376,21.775 43.422,23.821 43.422,28.897 47.5,32.975 v1(47.5,37.5)
M_RX3: R28.2 U6.22 | length 4.7
  Top Layer w0.2: U6.22 15.438,16.88 R28.2
M_SPREAD: R4.1 U6.17 | length 27.2
  Top Layer w0.2: U6.17 17.31,14.88 19.48,17.05 20.78,17.05 21.08,16.75 v2(21.08,16.475) ; R4.1 35.475,11.963 35.435,12.003 v2(35.435,12.67)
  Bottom Layer w0.2: v2(21.08,16.475) 21.245,16.64 31.755,16.64 35.435,12.96 v2(35.435,12.67)
M_STEP: R3.1 U6.18 | length 39.1
  Top Layer w0.2: U6.18 17.105,15.28 19.275,17.45 21.275,17.45 v2(21.8,17.975) ; v2(46.125,13.35) 46.575,13.35 47.138,13.913 R3.1
  Bottom Layer w0.2: v2(21.8,17.975) 22.285,18.46 32.49,18.46 38.05,12.9 45.675,12.9 v2(46.125,13.35)
M_TX3: R26.2 U6.21 | length 5.9
  Top Layer w0.2: U6.21 16.038,16.48 R26.2
MCU_RX: R13.2 U6.31 | length 23.8
  Top Layer w0.2: U6.31 v2(9.105,19.32) ; v2(19.755,16.55) 18.975,15.77 18.975,14 19.7,13.275 21.45,13.275 22.4,12.325 23.4,12.325 24.5,11.225 25.112,11.225 R13.2
  Bottom Layer w0.2: v2@9.101,19.326 v2@9.106,19.321 ; v2(9.105,19.32) 9.395,19.32 10.84,17.875 18.43,17.875 v2(19.755,16.55)
MCU_TX: R7.1 U6.30 | length 15.6
  Top Layer w0.2: v2@9.445,19.87 9.555,19.76 9.555,18.925 9.505,18.875 U6.30 ; R7.1 20.405,14.963 v2(20.405,16.5)
  Bottom Layer w0.2: v2(9.475,19.85) 9.525,19.85 11.13,18.245 18.835,18.245 20.405,16.675 v2(20.405,16.5)
NetC1_1: C1.1 C2.1 L1.1 U2.4 U2.5 | length 9.2
  Top Layer w0.8: L1.1 37.325,3.43 C1.1 39.015,3.928 C2.1 39.298,3.948 40.1,4.75 40.1,5.35 U2.4@41.025,6.275
NetC5_1: C5.1 U2.1 | length 2
  Top Layer w0.5: U2.1 45.753,4.555 C5.1
NetC5_2: C5.2 L4.1 U2.6 | length 7.6
  Top Layer w0.381: L4.1@42.36,2.005 L4.1 42.36,2.8 43.19,3.63 45.528,3.63 C5.2
  Top Layer w0.8: 41.34,4.255 41.34,3.025 L4.1@42.36,2.005
NetC8_1: C8.1 L2.1 U3.15 | length 4.1
  Top Layer w0.28: U3.15 44.986,12.839 45.39,12.435 C8.1 L2.1
NetC11_1: C11.1 U3.4 | length 3
  Top Layer w0.28: C11.1 36.775,15.48 37.915,14.34 U3.4
NetC11_2: C11.2 U3.5 | length 4.7
  Top Layer w0.28: C11.2 35.713,14.47 36.865,14.47 37.495,13.84 U3.5
NetC12_2: C12.2 C20.2 R29.2 U3.8 | length 5.5
  Top Layer w0.28: U3.8 39.704,10.401 C20.2
  Top Layer w0.5: R29.2 C12.2 C20.2
NetC13_1: C13.1 U3.6 | length 2.5
  Top Layer w0.28: C13.1 36.358,13.339 U3.6
NetC21_1: C21.1 R29.1 R35.2 U3.17 | length 24.3
  Top Layer w0.28: U3.17 44.435,13.84 44.925,14.33
  Top Layer w0.4: 44.925,14.33 46.195,15.6 C21.1 47.213,14.7 47.825,14.7 48.725,13.8 48.725,10.225 47.1,8.6 v1(46.25,7.75)
  Top Layer w0.5: R35.2 37.397,8.068 38.355,7.11 v1(39.13,7.11)
  Bottom Layer w0.5: v1(39.13,7.11) 39.3,7.28 45.78,7.28 v1(46.25,7.75)
NetC23_1: C23.1 J5.3 R41.1 | length 4.9
  Top Layer w0.5: J5.3 C23.1 48.275,35.49 R41.1
NetC41_2: C41.2 J8.1 R40.1 | length 8.3
  Top Layer w0.5: R40.1 C41.2 2.25,40.575 ; J8.1@2.25,42.3 2.25,41.1 ; J8.1@3.45,41.225 J8.1@3.45,41.325 ; J8.1@3.45,41.775 2.25,40.575 ; J8.1 2.25,41.1 ; 2.25,40.575 2.25,41.1
NetD2_1: D2.1 R10.1 | length 1.6
  Top Layer w0.254: D2.1 R10.1@19.563,9.697
  Top Layer w0.3: R10.1@19.563,9.697 R10.1
NetD2_2: D2.2 J3.15 | length 3.3
  Top Layer w0.254: J3.15 18.565,4.99 19.563,5.988 D2.2
NetD3_1: D3.1 R11.1 | length 1.6
  Top Layer w0.254: D3.1 R11.1@18.325,9.697
  Top Layer w0.3: R11.1@18.325,9.697 R11.1
NetD3_2: D3.2 J3.16 | length 5.7
  Top Layer w0.254: D3.2 18.325,5.625 17.5,4.8 17.5,2.985 J3.16
NetD5_1: D5.1 R13.1 | length 1.6
  Top Layer w0.254: D5.1 R13.1@25.755,9.698
  Top Layer w0.3: R13.1@25.755,9.698 R13.1
NetD5_2: D5.2 J3.10 | length 6.2
  Top Layer w0.254: J3.10 23.575,2.91 23.575,4.625 D5.2
NetD6_1: D6.1 R14.1 | length 1.6
  Top Layer w0.254: D6.1 R14.1@20.802,9.697
  Top Layer w0.3: R14.1@20.802,9.697 R14.1
NetD6_2: D6.2 J3.14 | length 5.8
  Top Layer w0.254: J3.14 19.565,2.92 19.565,4.965 20.802,6.202 D6.2
NetD7_1: D7.1 R15.1 | length 1.6
  Top Layer w0.254: D7.1 R15.1@22.04,9.697
  Top Layer w0.3: R15.1@22.04,9.697 R15.1
NetD7_2: D7.2 J3.13 | length 3.5
  Top Layer w0.254: J3.13@20.64,3.995 20.64,5.04 22.04,6.44 D7.2
  Top Layer w0.3: J3.13 J3.13@20.64,3.995
NetD8_1: D8.1 R16.2 | length 1.6
  Top Layer w0.3: D8.1 31.267,9.7 R16.2
NetD8_2: D8.2 J3.1 | length 4.5
  Top Layer w0.3: D8.2 31.772,7.33 v1(31.795,7.33)
  Bottom Layer w0.3: v1(31.795,7.33) 32.565,6.56 J3.1
NetD9_1: D9.1 R17.1 | length 1.6
  Top Layer w0.254: D9.1 R17.1@28.352,9.698
  Top Layer w0.3: R17.1@28.352,9.698 R17.1
NetD9_2: D9.2 J3.8 | length 5.6
  Top Layer w0.254: J3.8 27.575,2.93 27.575,5.675 28.352,6.452 D9.2
NetD10_1: D10.1 R18.2 | length 1.6
  Top Layer w0.254: D10.1 R18.2@24.517,9.7
  Top Layer w0.3: R18.2@24.517,9.7 R18.2@24.527,9.71
NetD10_2: D10.2 J3.11 | length 3.7
  Top Layer w0.254: J3.11 22.565,4.853 D10.2
NetD11_1: D11.1 R19.2 | length 1.6
  Top Layer w0.254: D11.1 R19.2@23.278,9.7
  Top Layer w0.3: R19.2@23.278,9.7 R19.2
NetD11_2: D11.2 J3.12 | length 6
  Top Layer w0.254: J3.12 21.575,2.91 21.575,4.91 23.278,6.613 D11.2
NetD12_1: D12.1 R20.2 | length 1.6
  Top Layer w0.254: D12.1 R20.2@27.113,9.7
  Top Layer w0.3: R20.2@27.113,9.7 R20.2
NetD12_2: D12.2 J3.7 | length 3.1
  Top Layer w0.254: J3.7 26.565,5.515 27.113,6.063 D12.2
NetD13_1: D13.1 R21.2 | length 1.6
  Top Layer w0.3: D13.1 32.555,9.7 R21.2
NetD13_2: D13.2 J3.2 | length 6.4
  Top Layer w0.3: D13.2 32.58,6.85 32.7,6.73 v1(33.325,6.73)
  Bottom Layer w0.3: J3.2 33.835,3.19 33.835,6.17 33.325,6.68 v1(33.325,6.73)
NetD17_1: D17.1 R25.1 | length 2.6
  Top Layer w0.3: D17.1 6.239,3.602 R25.1
NetJ3_9: J3.9 R12.2 | length 10.9
  Top Layer w0.254: J3.9 24.565,4.365 26.45,6.25 26.45,10.95 25.75,11.65 25.75,13.192 R12.2
NetJ5_1: J5.1 R39.1 | length 3.6
  Top Layer w0.381: J5.1 46.555,37.98 47.325,38.75 R39.1
  Top Layer w0.5: J5.1 J5.1@45.055,38
NetQ1_1: Q1.1 R9.1 | length 2.7
  Top Layer w0.4: R9.1 29.663,17.732 31.346,16.049 Q1.1
NetQ2_3: Q2.3 R12.1 | length 2.9
  Top Layer w0.2: Q2.3 23.95,14.5 24.425,14.975 25.7,14.975 26.125,14.55 R12.1
NetQ2_4: Q2.4 R7.2 | length 1.5
  Top Layer w0.2: R7.2 21.55,14.875 22.175,14.25 Q2.4
NetQ2_5: Q2.5 R6.2 | length 1.3
  Top Layer w0.2: R6.2 21.7,13.875 21.825,13.75 Q2.5
NetR1_2: R1.2 U3.2 | length 3.1
  Top Layer w0.25: R1.2 36.455,16.89 38.004,15.341 U3.2
NetR2_2: R2.2 U3.19 | length 3.4
  Top Layer w0.25: U3.19 44.175,14.84 46.155,16.82 R2.2@46.275,16.82
NetR3_2: R3.2 U3.16 | length 2.9
  Top Layer w0.25: U3.16 45.024,13.339 45.715,14.03 R3.2
NetR4_2: R4.2 U3.7 | length 2.8
  Top Layer w0.25: R4.2 37.217,12.839 U3.7
NetR5_2: R5.2 U3.12 | length 4.4
  Top Layer w0.2: U3.12 41.705,11.37 42.065,11.01 43.145,11.01 43.855,10.3 44.335,10.3 44.844,9.791 R5.2
NetR8_1: R8.1 U3.23 | length 2.4
  Top Layer w0.28: U3.23 42.206,17.451 42.395,17.64 42.395,19.109 R8.1
NetR26_1: R26.1 R28.1 U3.14 | length 31.4
  Top Layer w0.2: R28.1 R26.1 18.583,18.808 18.7,18.925 21.7,18.925 22.5,18.125 v2(22.5,17.975) ; U3.14 42.706,11.609 42.805,11.51 v2(43.585,11.51)
  Bottom Layer w0.2: v2@22.525,17.95 32.375,17.95 37.915,12.41 42.685,12.41 v2(43.585,11.51)
NetR27_1: R27.1 U3.27 | length 2.4
  Top Layer w0.28: R27.1 40.085,19.089 40.085,17.64 40.204,17.521 U3.27
NetR30_2: R30.2 U3.11 | length 3.9
  Top Layer w0.2: U3.11 41.205,11.34 41.885,10.66 42.885,10.66 43.838,9.707 R30.2
NetR32_1: R32.1 U3.9 | length 2.9
  Top Layer w0.2: U3.9 40.204,11.251 41.812,9.643 R32.1
NetR34_1: R34.1 U3.10 | length 3.5
  Top Layer w0.2: U3.10 40.715,11.829 40.715,11.3 41.705,10.31 42.35,10.31 42.831,9.829 R34.1
NRST: C16.2 R11.2 R31.1 U6.7 | length 21.1
  Top Layer w0.2: C16.2 R31.1 11.462,3.562 13.325,5.425 13.325,7.775 13.65,8.1 13.65,9.18 v1(12.205,10.625) 11.955,10.875 10.68,10.875 9.505,12.05 U6.7 ; v1(14.75,10.875) 18.033,10.875 R11.2
  Bottom Layer w0.2: v1(12.205,10.625) 12.455,10.875 v1(14.75,10.875)
NTC_1601: C10.2 TR1.2 U6.11 | length 8.7
  Top Layer w0.2: U6.11 11.105,12.075 11.305,11.875 12.805,11.875 14.83,9.85 C10.2 15.938,9.075 16.575,9.075 17.035,8.615 TR1.2
OGND: J3.5 J3.6 Q1.2 | length 12.6
  Top Layer w1.3: J3.6 J3.5 28.805,4.16 28.805,5.33 29.9,6.425 29.9,12.095 30.385,12.58 Q1.2
OSC32K_I: C14.1 U6.3 Y1.2 | length 9
  Top Layer w0.2: Y1.2@3.265,6.49 4.1,7.325 ccw(c3.557,7.868) 4.325,7.868 4.325,8.93 cw(c5.073,8.93) 4.544,9.459 ; 4.544,9.459 4.99,9.905 cw(c5.533,9.362) 5.533,10.13 6.842,10.13 ccw(c6.842,11.103) 7.53,10.415 7.67,10.555 ; 7.67,10.555 ccw(c7.103,11.122) 7.905,11.122 U6.3
OSC32K_O: C15.1 U6.4 Y1.1 | length 8.8
  Top Layer w0.2: Y1.1@6.059,6.49 5.357,7.192 cw(c5.845,7.68) 5.155,7.68 5.155,9.284 cw(c5.531,9.284) 5.265,9.55 5.355,9.64 cw(c5.548,9.447) 5.548,9.72 7.057,9.72 ccw(c7.057,10.608) 7.684,9.979 ; 7.685,9.98 8.03,10.325 ccw(c7.366,10.989) 8.305,10.989 U6.4
OSC32M_I: C17.2 U6.5 Y2.1 | length 8.3
  Top Layer w0.2: U6.5 8.705,10.674 ccw(c9.379,10.674) 8.902,10.198 9.574,9.526 cw(c8.698,8.65) C17.2 9.937,6.501 cw(c9.299,6.501) 9.75,6.05 9.113,5.413 cw(c8.9,5.627) Y2.1 Y2.1@9.025,5.325
OSC32M_O: C18.2 U6.6 Y2.3 | length 7.6
  Top Layer w0.2: U6.6 9.105,10.783 ccw(c9.668,10.783) 9.27,10.385 ; 9.27,10.385 9.48,10.175 ccw(c10.204,10.899) 10.204,9.875 10.732,9.875 cw(c10.732,9.107) 11.275,9.65 11.438,9.487 cw(c10.926,8.975) 11.65,8.975 11.65,7.91 cw(c10.54,7.91) 11.325,7.125 11.238,7.038 cw(c11.025,7.252) Y2.3@11.025,6.95
PA13/SWDIO: J2.2 U6.34 | length 8.1
  Top Layer w0.2: v2(5.425,19.25) 7.55,19.25 7.905,18.895 U6.34
  Bottom Layer w0.2: J2.2 3.365,17.365 3.725,17.725 4.825,17.725 5.425,18.325 v2(5.425,19.25)
PA14/SWCLK: J2.3 U6.37 | length 5
  Top Layer w0.2: v2(4.575,18.225) 5.325,18.225 5.87,17.68 U6.37
  Bottom Layer w0.2: J2.3 4.165,18.635 v2(4.575,18.225)
SLED: D17.2 U6.2 | length 16
  Top Layer w0.2: D17.2@4.535,3.782 D17.2 2.623,3.602 1.525,4.7 1.525,8.995 3.58,11.05 4.355,11.05 4.83,11.525 7.005,11.525 7.505,12.025 U6.2
SPI_FLASH_CLK: U6.26 U10.6 | length 10.3
  Top Layer w0.2: U6.26 11.105,20.55 cw(c11.6,20.55) 11.25,20.9 11.824,21.474 cw(c12.25,21.048) 12.25,21.65 12.487,21.65 cw(c12.487,21.137) 12.85,21.5 12.887,21.463 cw(c12.673,21.25) 12.975,21.25 ccw(c13.337,21.25) 13.081,20.994 ccw(c13.308,21.221) 13.308,20.9 13.469,20.9 ccw(c13.469,21.156) 13.65,20.975 ccw(c13.409,21.216) 13.75,21.216 13.75,21.767 cw(c14.253,21.767) 13.897,22.122 14.112,22.337 ccw(c13.595,22.852) 14.325,22.852 14.325,24.1 ccw(c13.721,24.1) 14.148,24.527 13.81,24.865 U10.6
SPI_FLASH_CS: U6.25 U10.1 | length 11.3
  Top Layer w0.2: v2(7.075,26.85) 7.63,27.405 U10.1 ; U6.25 v2@11.505,20.575
  Bottom Layer w0.2: v2(7.075,26.85) 7.406,26.519 cw(c6.936,26.05) 7.6,26.05 7.6,25.347 ccw(c8.197,25.347) 7.774,24.926 11.441,21.259 cw(c11.057,20.875) 11.6,20.875 v2(11.6,20.575)
SPI_FLASH_MISO: U6.27 U10.2 | length 9.7
  Top Layer w0.2: v2(7.075,25.6) 7.61,26.135 U10.2 ; U6.27 v2@10.705,21.175
  Bottom Layer w0.2: v2(7.075,25.6) 7.075,25.183 ccw(c7.758,25.183) 7.275,24.7 v2(10.8,21.175)
SPI_FLASH_MOSI: U6.28 U10.5 | length 10.3
  Top Layer w0.2: U6.28 10.305,22.381 cw(c10.725,22.381) 10.428,22.678 cw(c10.662,22.444) 10.662,22.775 10.859,22.775 cw(c10.859,22.434) 11.1,22.675 cw(c10.919,22.494) 11.175,22.494 11.175,22.181 ccw(c11.431,22.181) 11.25,22 ccw(c11.431,22.181) 11.431,21.925 11.509,21.925 ccw(c11.509,22.266) 11.75,22.025 ccw(c11.509,22.266) 11.85,22.266 11.85,22.375 cw(c12.27,22.375) 11.973,22.672 cw(c12.207,22.438) 12.207,22.769 cw(c12.207,22.168) 12.632,22.593 12.85,22.375 ccw(c13.031,22.556) 13.031,22.3 13.208,22.3 ccw(c13.208,22.582) 13.407,22.382 ; 13.408,22.383 13.681,22.656 ccw(c13.211,23.125) 13.875,23.125 13.875,23.3 13.58,23.595 U10.5
STROBE: R10.2 U6.12 | length 8.9
  Top Layer w0.2: U6.12 11.627,12.45 17.375,12.45 18.55,11.275 18.871,11.275 R10.2
VCC_IN: C6.1 C9.1 C13.2 J3.3 J3.4 L1.2 R9.2 R22.2 U3.22 U3.28 | length 82.6
  Top Layer w0.254: 33.255,13.47 C13.2
  Top Layer w0.28: C6.1@37.699,19.156 39.704,17.151 U3.28 ; U3.22 42.706,17.046 44.816,19.156 C9.1
  Top Layer w0.3: v1(9,29.25) 9.363,29.613 R22.2
  Top Layer w0.5: R9.2 31.955,17.87 33.225,16.6
  Top Layer w0.8: C6.1 37.595,19.84 38.295,20.54 44.145,20.54 44.865,19.82 C9.1
  Top Layer w1: J3.3@30.565,3.91 J3.3 30.565,4.59 31.525,5.55 33.815,5.55 ; L1.2 35.665,5.19 35.305,5.55 33.815,5.55 ; C6.1@37.175,19.12 36.745,18.69 35.315,18.69 33.225,16.6 33.225,11.87 34.475,10.62 34.475,6.21 33.815,5.55
  Top Layer w1.3: J3.4 J3.3@30.565,3.91
  Bottom Layer w0.3: v1(9,29.25) 9,25.75 13,21.75 13,20.6 13.675,19.925 20.4,19.925 20.675,20.2 37.7,20.2 v1(37.875,20.375)
VDD_3V3: C3.1 C4.1 C7.1 C29.2 C30.2 C31.2 C40.2 J2.1 L2.2 L3.2 L4.2 R6.1 R23.2 R24.2 R25.2 R31.2 R32.2 R34.2 R36.2 R37.2 R38.2 R41.2 TR1.1 U2.3 U6.1 U6.24 U6.36 U6.48 U10.3 U10.7 U10.8 | length 223.8
  Top Layer w0.2: C30.2 4.612,19.113 5.03,18.695 6.93,18.695 7.105,18.52 U6.36 ; U6.48 C29.2 4.38,12.875 6.975,12.875 7.105,12.745 U6.1 ; U6.24 14.105,17.68 C31.2 ; R38.2 50.55,36.133 50.55,34.561 R41.2
  Top Layer w0.254: L3.2 13.639,1.25 16.55,1.25 16.85,1.55 16.85,2.737 C40.2 16.925,4.512 16.925,5.815 TR1.1 ; v1(19.55,14.7) 19.55,14.2 19.875,13.875 R6.1 ; R34.2 42.831,7.889 43.315,7.405 45.52,7.405 ; U2.3 45.64,6.455 46.815,5.28 46.815,4.81 C3.1@47.8,3.825
  Top Layer w0.3: R24.2 R36.2 R37.2 ; C30.2 4.5,19.225 6,20.725 R37.2 ; U10.3 6.885,24.865 ; v1(8.25,28.475) 7.4,28.475 6.775,27.85 6.775,27.45 6.375,27.05 6.375,25.375 6.885,24.865 ; R32.2 R34.2 ; R37.2 6.517,21.942 6.75,22.175 6.75,24.73 6.885,24.865
  Top Layer w0.381: L2.2 47.767,10.267 45.52,8.02 45.52,7.405 47.45,5.475 v1(47.69,5.475) 48.675,5.475 50.465,7.265 50.465,32.941 49.799,33.607 R41.2
  Top Layer w0.5: 1.215,12.21 1.215,9.59 0.975,9.35 0.975,4.1 4.085,0.99 6.655,0.99 ; R25.2 6.655,0.99 ; v1(8.25,29.2) v1(8.25,28.475) 11.575,28.475 12,28.9 R23.2 C7.1 U10.8@13.5,27.43 ; v1(12.275,20.875) 12.275,20.31 v1(12.41,20.175) C31.2 16,19.575 21.95,19.575 23.25,18.275 23.25,15.075 v1(23.45,14.875) v1(22.75,14.875) ; L3.2 10.777,2.077 R31.2 9.729,0.99 6.655,0.99 ; U10.7 U10.8
  Top Layer w0.6: J2.1 1.215,15.51 1.215,12.21 3.335,12.21 3.975,12.85 ; C29.2 3.975,12.85 ; v1(6.375,12.25) v1(5.675,12.25) 4.575,12.25 3.975,12.85
  Top Layer w0.8: L4.2@44.02,2.005 C4.1 47.428,2.718 47.791,3.081 47.791,3.666 C3.1 47.69,4.185 v1(47.69,4.775) v1(47.69,5.475)
  Bottom Layer w0.5: v1(8.25,29.2) v1(8.25,28.475) 8.25,25.45 12.275,21.425 v1(12.275,20.875) 12.275,20.31 v1(12.41,20.175)
  Bottom Layer w0.6: v1(5.675,12.25) v1(6.375,12.25) 6.85,12.25 7.15,11.95 24.35,11.95 24.475,12.075 v1@25.075,12.075
  Bottom Layer w0.7: v1(19.55,14.7) 30.2,14.7 32.705,12.195 32.705,10.78 36.265,7.22 36.265,5.36 37.195,4.43 47.205,4.43 47.69,4.915 v1(47.69,5.475)
  other v1: 24.425,12.125 25.125,12.125 24.7,14.425 25.4,14.425
VDD_ME: C19.1 C22.1 J4.1 R22.1 R23.1 U1.1 | length 26.5
  Top Layer w0.254: U1.1 4.625,25.25 5.375,26 C19.1 6.175,27.788 6.175,28.175 6.5,28.5 v1(6.5,30.375)
  Top Layer w0.3: v1(3.5,36.25) 2.887,36.25 C22.1 2.988,37.625 4.525,37.625 5.3,38.4 J4.1
  Top Layer w0.5: v1(6.5,30.375) 8.625,30.375 9.387,31.137 R22.1 R23.1
  Bottom Layer w0.3: v1(3.5,36.25) 3.5,33.375 v1(6.5,30.375)
VDDA: C51.2 L3.1 U6.9 | length 13.6
  Top Layer w0.2: U6.9 10.305,12.025 10.53,11.8
  Top Layer w0.381: 10.53,11.8 10.955,11.375 12.38,11.375 14.15,9.605 14.15,7.825 13.85,7.525 13.85,5.425 14.15,5.125 C51.2@14.15,3.943
  Top Layer w0.4: L3.1@12.689,3.599 L3.1 ; L3.1 L3.1 ; C51.2@14.15,3.943 14.494,3.599 C51.2 L3.1
pads on no net: J4.9 J4.10 Q2.1 Q2.2 Q2.6 U1.3 U1.9 U1.10 U1.11 U1.13 U3.25 U6.10 U6.38 Y2.4

## Polygon pours and split planes (outlines as drawn)
GND on Top Layer "Top Layer-No Net" (solid, remove dead copper, pour order 5): 0,4 ccw(c4,4) 4,0 47.1,0 ccw(c47.1,4) 51.1,4 51.1,45.6 42.8,45.6 42.8,24.2 cw(c41.8,24.2) 41.8,23.2 36,23.2 36,21.7 cw(c35,21.7) 35,20.7 16.1,20.7 cw(c16.1,21.7) 15.1,21.7 15.1,32.5 9.2,32.5 cw(c9.2,33.5) 8.2,33.5 8.2,45.6 0,45.6
GND on Bottom Layer "Top Layer-No Net1" (solid, remove dead copper, pour order 6): 0,4 ccw(c4,4) 4,0 47.1,0 ccw(c47.1,4) 51.1,4 51.1,45.6 42.8,45.6 42.8,24.2 cw(c41.8,24.2) 41.8,23.2 36,23.2 36,21.7 cw(c35,21.7) 35,20.7 16.1,20.7 cw(c16.1,21.7) 15.1,21.7 15.1,32.5 9.2,32.5 cw(c9.2,33.5) 8.2,33.5 8.2,45.6 0,45.6

## Keep-outs
Keep-Out Layer:
  circle w0.127: c46.95,43 r1.7
  lines w0.127: 0,4 ccw(c4,4) 4,0 47.1,0 ccw(c47.1,4) 51.1,4 51.1,45.6 42.8,45.6 42.8,24.2 cw(c41.8,24.2) 41.8,23.2 36,23.2 36,21.7 cw(c35,21.7) 35,20.7 16.1,20.7 cw(c16.1,21.7) 15.1,21.7 15.1,32.5 9.2,32.5 cw(c9.2,33.5) 8.2,33.5 8.2,45.6 0,45.6 0,4
Multi-Layer:
  circle w0.127: c46.95,43 r2.6

## Other copper
Top Layer:
  rectangle net GND: 35.03,0.625 35.955,2.875
  rectangle net GND: 36.355,0.7 37.205,2.25
  rectangle net GND: 35.48,0.625 36.48,1.775
  rectangle net NetC1_1: 40.425,5.35 41.375,6.25
  rectangle net GND: 40.7,7.55 40.925,7.75
  rectangle net GND: 0.435,33.34 0.74,37.842
  rectangle net GND: 8.9,22.969 9.89,23.425
  rectangle net GND: 13.8,31.137 14.275,31.55
  rectangle net GND: 14.275,28.275 14.725,31.137
  rectangle net GND: 14.6,20.675 14.9,20.9
  rectangle net GND: 14.675,20.25 15.075,20.525
  rectangle net GND: 0.35,16.125 0.675,24.875
  rectangle net GND: 10.95,0.45 12,0.825
  rectangle net GND: 49.025,2.025 49.7,2.775
  rectangle net GND: 48.075,7.005 49.22,7.85
  rectangle net GND: 43.65,21.4 46,23.075
  rectangle net GND: 28.35,15 29.425,16.7
  rectangle net GND: 29.35,14.95 30.2,15.875
  region net NetC11_2: 38.455,13.98 37.685,13.98 36.955,14.71 35.685,14.71 34.805,15.59 34.305,15.59 34.305,15.32 35.405,14.22 36.765,14.22 37.285,13.7 38.455,13.7
  region net NetC11_1: 38.425,14.48 38.165,14.48 36.765,15.88 36.195,15.88 36.165,15.85 36.165,15.12 36.205,15.08 36.975,15.08 37.855,14.2 38.405,14.2 38.425,14.22
  region net A+: 41.842,16.838 41.842,17.502 42.065,17.725 42.065,18.11 41.925,18.211 41.533,18.211 41.403,18.081 41.403,17.55 41.563,17.39 41.563,16.838
  region net B+: 40.844,17.315 41.125,17.596 41.125,18.09 40.965,18.257 40.612,18.257 40.445,18.09 40.445,17.78 40.548,17.66 40.548,16.878 40.566,16.86 40.844,16.86
  region net VCC_IN: 39.843,17.206 37.718,19.331 37.206,19.331 37.206,18.967 39.654,16.519 39.73,16.519 39.843,16.632
  region net VCC_IN: 42.571,16.758 42.57,17.106 44.085,18.621 44.085,19.191 44.152,19.258 45.622,19.258 45.664,19.216 45.664,19.07 43.848,17.254 43.352,16.758 42.852,16.758
  region net NetR8_1: 42.065,16.804 42.065,17.508 42.255,17.698 42.255,18.19 41.644,18.801 41.644,19.456 41.721,19.533 43.198,19.533 43.241,19.49 43.241,18.172 42.346,17.277 42.346,16.822 42.328,16.804
  region net NetR27_1: 40.065,16.64 40.065,17.44 39.225,18.28 39.225,19.44 39.325,19.54 40.765,19.54 40.815,19.49 40.815,18.78 40.225,18.19 40.225,17.61 40.345,17.49 40.345,16.65 40.335,16.64
  region net VDD_3V3: 24.675,14.675 25.475,14.675 25.6,14.55 25.6,13.575 25.35,13.325 25.35,12.075 25.15,11.875 24.325,11.875 24.15,12.05 24.15,12.35 24.625,12.825 24.625,13.675 24.75,13.8 24.75,14.05 24.475,14.325 24.475,14.5 24.5,14.5
  pour cut-out: 0.075,45.575 8.175,45.575 8.575,45.175 8.575,39.275 8.05,38.75 6.3,38.75 5.95,39.1 3.529,39.1 3.379,39.251 3.379,38.979 3,38.6 0.05,38.6 -0.075,38.725 -0.075,45.425
  region net GND: 14.2,31.775 14.725,31.775 14.825,31.675 14.825,30.825 14.575,30.825 14.125,31.275 14.125,31.7
  region net GND: 0.375,3.872 3.895,0.352 3.895,0.32 3.255,0.32 3,0.575 2.7,0.575 0.65,2.625 0.65,2.875 0.375,3.15
Bottom Layer:
  rectangle net VDD_3V3: 24.6,14.225 25.45,14.525
  rectangle net GND: 0.9,19.475 2.85,20.85
  rectangle net GND: 27.3,12.65 28.6,13.05
  pour cut-out: 0.075,45.575 8.175,45.575 8.575,45.175 8.575,39.275 8.4,39.1 5.95,39.1 3.529,39.1 3.379,39.251 3.379,39.1 -0.075,39.1 -0.075,45.425

## Silkscreen, mask and mechanical layers (free items; w line width, h text height)
Top Overlay:
  circle w0.127: c4.15,43 r1.7
  text "R+" at 43,38.7 h0.6 r270
  text "R-" at 43,37.2 h0.6 r270
  text "S+" at 42.995,35.64 h0.6 r270
  text "S-" at 43,34.075 h0.6 r270
  text "B-" at 43.955,29.82 h0.8
  text "B+" at 43.955,27.79 h0.8
  text "A-" at 43.945,25.88 h0.8
  text "A+" at 43.955,23.89 h0.8
  text "L1-2" at 19.375,17.5 h2.54
  text "GND" at 0.25,14.525 h0.6
  text "SCK" at 0.25,13.675 h0.6
  text "DIO" at 0.4,12.75 h0.6
  text "VDD" at 0.25,11.9 h0.6
Bottom Overlay:
  lines w0.127: 17.635,8.43 33.775,8.43 ; 19.485,5.38 19.485,13.62 ; 21.435,5.39 21.435,13.65 ; 23.495,5.41 23.495,13.64 ; 25.445,5.42 25.445,13.68 ; 27.455,5.39 27.455,13.65 ; 29.475,5.4 29.475,13.66 ; 31.475,5.41 31.475,13.61 ; 33.805,5.4 17.615,5.4 17.615,13.68 33.805,13.68 33.805,13.38 33.805,5.41
  text "R+" at 47.175,37.65 h0.7
  text "R-" at 47.175,36.425 h0.7
  text "S+" at 47.175,35.175 h0.7
  text "S-" at 47.175,33.925 h0.7
  text "B-" at 46.07,29.595 h0.8
  text "B+" at 46.07,27.565 h0.8
  text "A-" at 46.08,25.655 h0.8
  text "A+" at 46.07,23.665 h0.8
  text "GND" at 4.35,19.55 h0.6
  text "SCK" at 4.3,18.325 h0.6
  text "L1-2" at 29.975,17.275 h2.54
  text "DIO" at 4.025,17.025 h0.6
  text "VDD" at 4.225,15.8 h0.6
  text "D4" at 26.075,9.15 h0.8 r270
  text "D0" at 32.155,9.16 h0.8 r270
  text "STROBE" at 18.035,9.13 h0.8 r270
  text "BUSY" at 20.085,9.13 h0.8 r270
  text "D2" at 22.125,9.12 h0.8 r270
  text "GND" at 28.105,9.13 h0.8 r270
  text "VCC" at 29.985,9.1 h0.8 r270
  text "TX" at 24.075,9.09 h0.8 r270
  text "RST" at 18.065,6.06 h0.8 r270
  text "D3" at 22.135,6.05 h0.8 r270
  text "RX" at 24.095,6.07 h0.8 r270
  text "D1" at 26.055,6.04 h0.8 r270
  text "VCC" at 29.995,6.03 h0.8 r270
  text "D5" at 32.135,6.04 h0.8 r270
  text "ALM" at 20.135,5.96 h0.8 r270
  text "GND" at 28.085,5.74 h0.8 r270
  text "15" at 17.27,3.59 h0.8
  text "1" at 34.325,3.45 h0.8
  text "16" at 17.12,1.59 h0.8
  text "2" at 34.525,1.525 h0.8

## Text inside footprints (layer, text, board x,y; h text height)
J3: Top Overlay "1" at 34.1,3.55 h1; Top Overlay "15" at 16.8,3.35 h0.65; Top Overlay "16" at 16.8,2.225 h0.65; Top Overlay "2" at 34.125,1.775 h1